# Altium PCB YarnControl_Mainboard_v1.2.PcbDoc
Units mm, origin at the board's own origin, x right, y up, seen from the top; angles counter-clockwise.
Board outline 136.75 x 120 mm, 2 copper layers (Top Layer, Bottom Layer); 124 components, 112 nets, 482 pads, 903 vias.
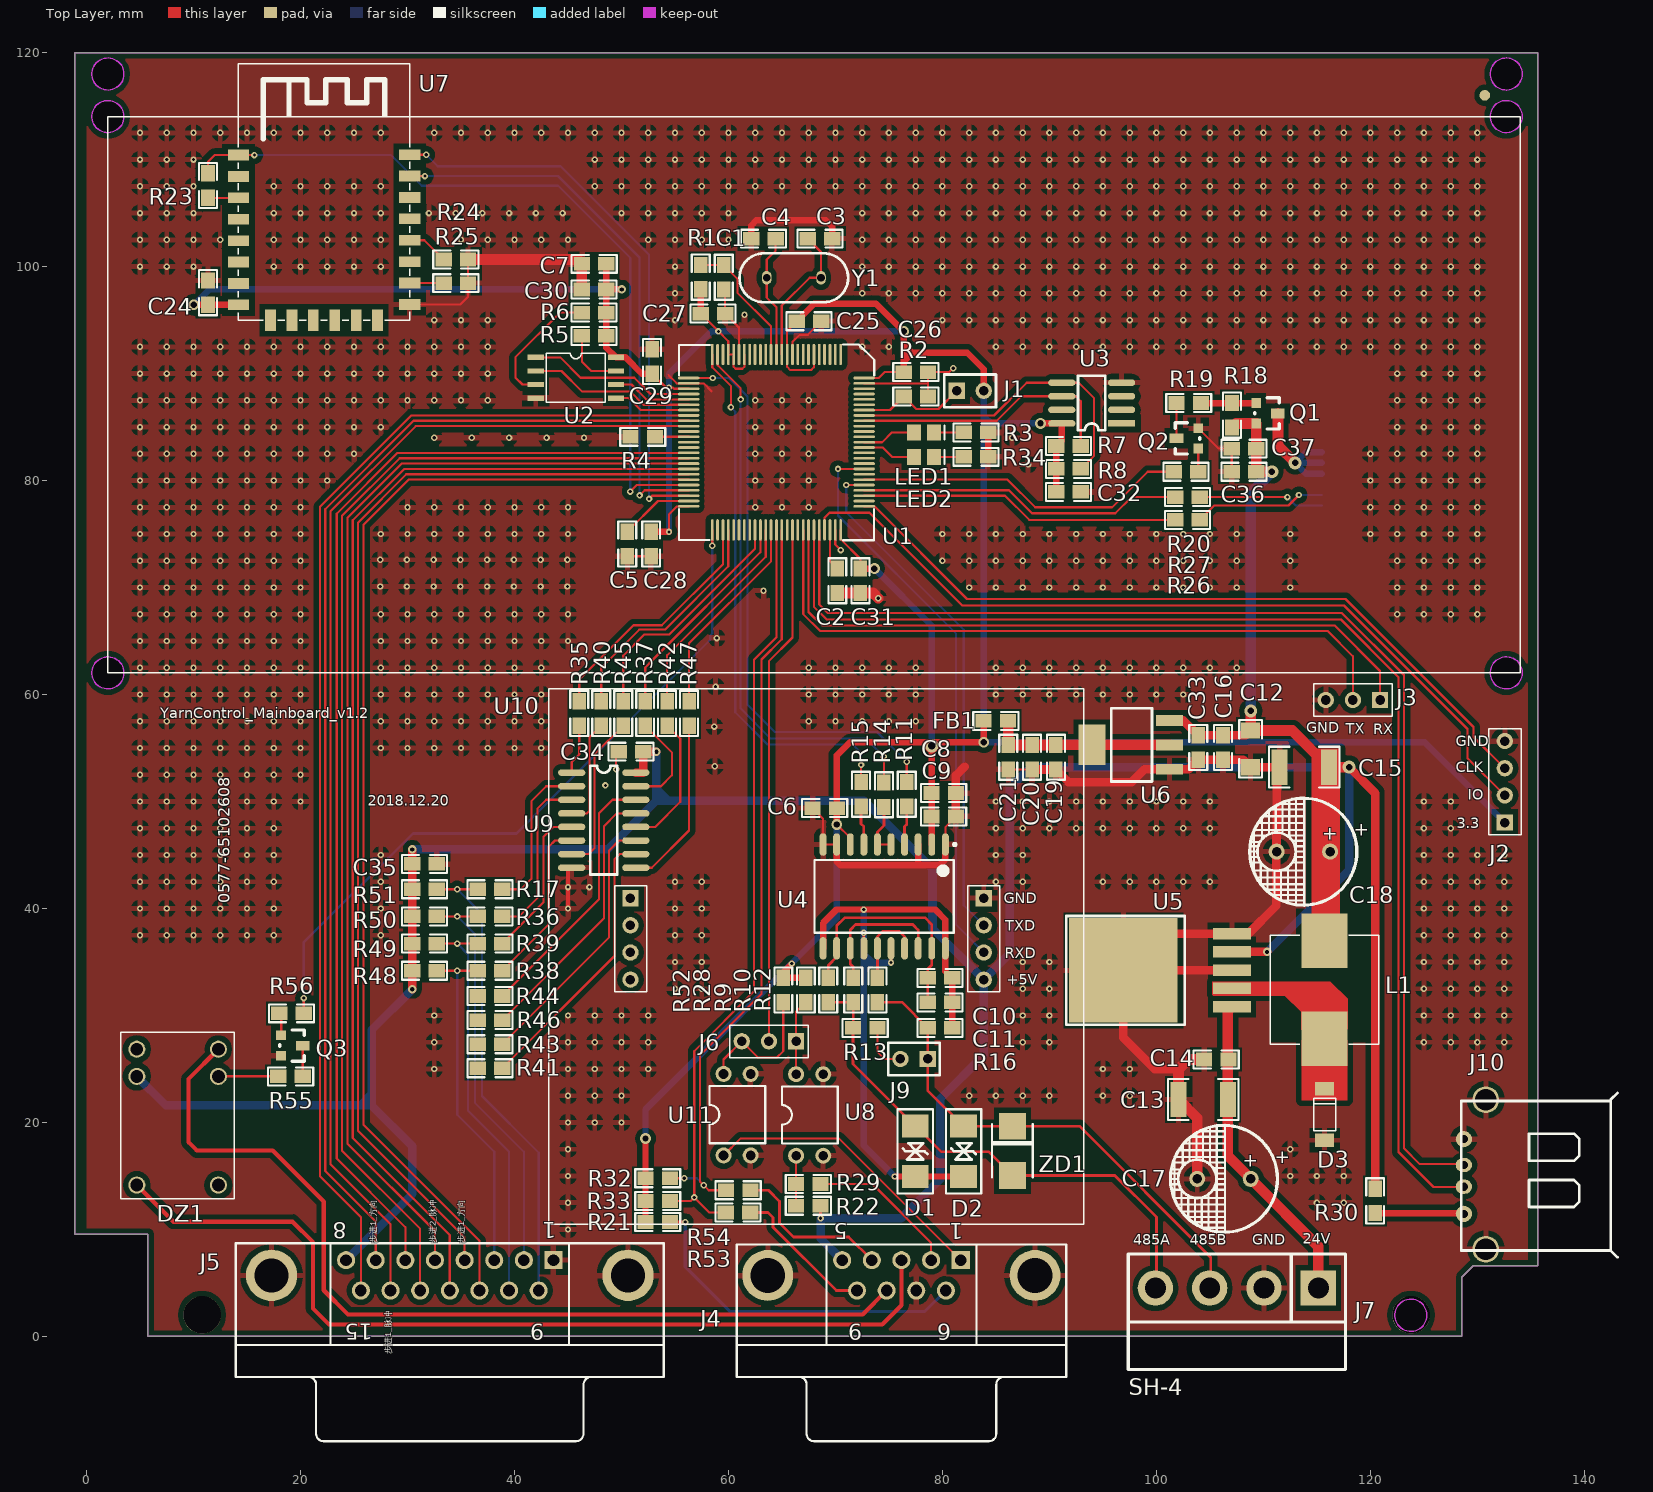
[diagram p0: Top Layer view]
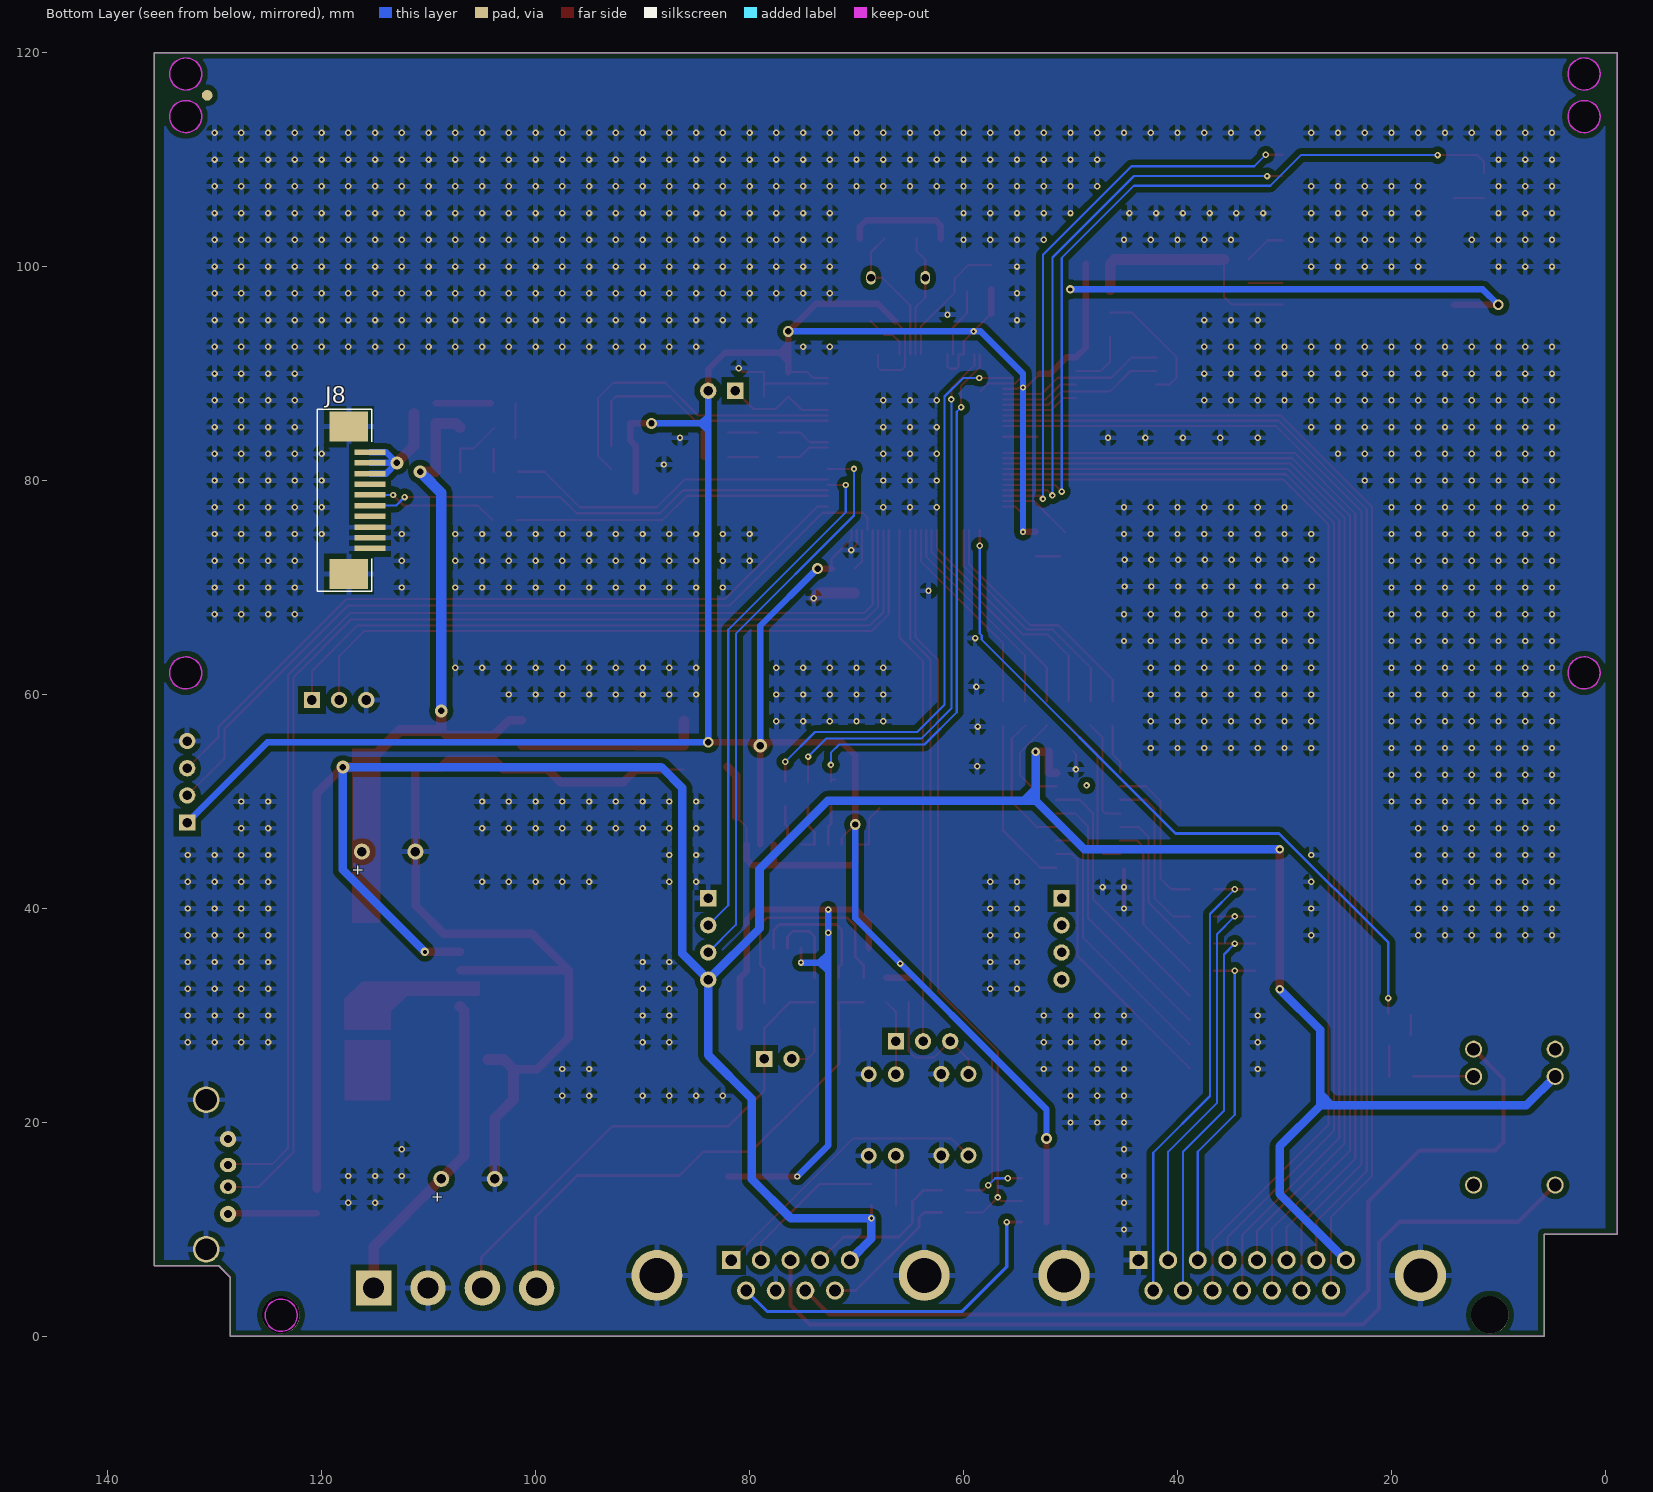
[diagram p1: Bottom Layer view, seen from below]

## Layer stack, top to bottom
Top Layer: signal copper 0.0356
Dielectric: dielectric 0.32, FR-4, Dk 4.8
Bottom Layer: signal copper 0.0356

## Board outline
-1.118,9.55 -1.118,120 135.636,120 135.636,6.604 129.616,6.604 128.549,5.537 128.549,0 5.74,0 5.74,9.55
cut-out: 131.2,118 ccw(c132.7,118) 132.7,116.5 ccw(c132.7,118) 134.2,118 ccw(c132.7,118) 132.7,119.5 ccw(c132.7,118)
cut-out: 131.2,114.019 ccw(c132.7,114.019) 132.7,112.519 ccw(c132.7,114.019) 134.2,114.019 ccw(c132.7,114.019) 132.7,115.519 ccw(c132.7,114.019)
cut-out: 131.2,62.019 ccw(c132.7,62.019) 132.7,60.519 ccw(c132.7,62.019) 134.2,62.019 ccw(c132.7,62.019) 132.7,63.519 ccw(c132.7,62.019)
cut-out: 2,60.519 cw(c2,62.019) 0.5,62.019 cw(c2,62.019) 2,63.519 cw(c2,62.019) 3.5,62.019 cw(c2,62.019)
cut-out: 2,112.519 cw(c2,114.019) 0.5,114.019 cw(c2,114.019) 2,115.519 cw(c2,114.019) 3.5,114.019 cw(c2,114.019)
cut-out: 2,116.5 cw(c2,118) 0.5,118 cw(c2,118) 2,119.5 cw(c2,118) 3.5,118 cw(c2,118)

## Design rules (kind name [scope] priority, off if disabled: settings)
Clearance Clearance_1 [inpoly] p1: gap=0.508
Clearance TQFP100 [(HasFootprint('TQFP100'))] p2: gap=0.178
Clearance [All] p3: gap=0.203
ComponentClearance [All] p1: gap=0 collisioncheckmode=3 verticalgap=0.254 showdistances=FALSE
HoleSize [All] p1: absolutevalues=TRUE maxlimit=4 minlimit=0.025 maxpercent=80.000 minpercent=20.000
MinimumSolderMaskSliver [All] p1: minsoldermaskwidth=0
PolygonConnect [All] p1: connectstyle=Relief reliefconductorwidth=0.508 reliefentries=4 polygonreliefangle="90 Angle"
RoutingVias [All] p1: holewidth=0.711 width=1.27 viastyle="Through Hole" minholewidth=0.3 minwidth=0.6 maxholewidth=0.711 maxwidth=1.27
SilkToSilkClearance [All] p1: silktosilkclearance=0
SilkscreenOverComponentPads [All] p1: minsilkscreentomaskgap=0
SolderMaskExpansion [All] p1: expansion=0.102
Width [All] p1: maxlimit=2 minlimit=0.203 preferedwidth=0.203
23 further rules are at their usual default settings.

## Classes and differential pairs
component class mainboard_interface.v1.2: DZ1 J4 J6 J8 J10 Q1 Q2 Q3 R18 R19 R20 R21 R22 R26 R27 R28 R29 R30 R32 R33 R52 R53 R54 R55 R56 U8 U10 U11
component class mainboard_mcu.v1.2: C1 C2 C3 C4 C5 J1 J2 J3 LED1 LED2 R1 R2 R3 R4 R5 R6 R7 R8 R34 U1 U2 U3 Y1
component class mainboard_rs485.v1.2: C6 C7 C8 C9 C10 C11 C12 C13 C14 C15 C16 C17 C18 C19 C20 C21 C25 C26 C27 C28 C29 C30 C31 C32 C33 C34 C35 C36 C37 D1 D2 D3 FB1 J7 J9 L1 R9 R10 R11 R12 R13 R14 R15 R16 U4 U5 U6 ZD1
component class mainboard_wifi.v1.2: C24 R23 R24 R25 U7
component class mainboard_motor.v1.2: J5 R17 R35 R36 R37 R38 R39 R40 R41 R42 R43 R44 R45 R46 R47 R48 R49 R50 R51 U9

## Components (designator, comment, footprint, x,y, rotation, side; value= is the part's Value field where it differs from the comment)
C1 "0.1uF" 0805#1 59.556,97.86 r90 top
C2 "2.2uF" 0805#1 70.174,69.488 r90 top
C3 "22p" 0805#1 67.405,102.609 r0 top
C4 "22p" 0805#1 64.408,102.609 r180 top
C5 "2.2uF" 0805#1 50.539,75.203 r270 top
C6 "10uF" 0805#1 67.85,49.384 r0 top
C7 "0.1uF" 0805#1 46.304,100.254 r0 top
C8 "0.1uF" 0805#1 81.261,50.798 r180 top
C9 "10nF" 0805#1 81.261,48.597 r180 top
C10 "10uF" 0805#1 80.906,33.509 r180 top
C11 "0.1uF" 0805#1 80.906,31.223 r180 top
C12 "22uF" 1206 108.814,53.213 r90 top
C13 "47uF" 1812 104.369,22.149 r0 top
C14 "0.1uF" 0805#2 105.588,25.883 r0 top
C15 "47uF" 1812 113.817,53.213 r0 top
C16 "0.1uF" 0805#1 106.223,53.899 r90 top
C17 "220uF" CAP-5mm 108.814,14.732 r180 top
C18 "330uF" CAP-5mm 116.23,45.314 r180 top
C19 "10uF" 0805#1 90.602,52.991 r90 top
C20 "0.1uF" 0805#1 88.375,52.991 r90 top
C21 "0.1uF" 0805#1 86.148,52.991 r90 top
C24 "0.1uF" 0805#1 11.354,98.704 r270 top
C25 "0.1uF" 0805#1 68.675,94.888 r180 top
C26 "0.1uF" 0805#1 78.657,90.138 r180 top
C27 "0.1uF" 0805#1 59.69,95.606 r180 top
C28 "0.1uF" 0805#1 52.775,72.917 r90 top
C29 "0.1uF" 0805#1 52.857,92.278 r270 top
C30 "0.1uF" 0805#1 46.298,97.86 r0 top
C31 "0.1uF" 0805#1 72.333,69.488 r90 top
C32 "0.1uF" 0805#1 92.932,78.937 r180 top
C33 "0.1uF" 0805#1 103.911,53.899 r90 top
C34 "0.1uF" 0805#1 49.747,54.661 r0 top
C35 "0.1uF" 0805#1 32.741,44.171 r180 top
C36 "0.1uF" 0805#1 107.036,80.823 r0 top
C37 "0.1uF" 0805#1 107.036,82.982 r0 top
D1 "TVS" SMBJ_DO-214 77.451,17.304 r90 top
D2 "TVS" SMBJ_DO-214 81.972,17.304 r90 top
D3 "1N5819" Diode_TP2 115.722,18.339 r90 top
DZ1 "HRS1H-S-5V" HRS1H-S-DC5 8.509,20.498 r270 top
FB1 "FERRITE" 0805#1 86.131,57.531 r180 top
J1 "Jumper" J254-2 81.324,88.385 r0 top
J2 "SH-4" J254-4 132.563,48.031 r90 top
J3 "SH-3" J2.54-3 118.364,59.487 r180 top
J4 "D Connector 9" DSUB1.385-2H9 76.168,-3.791 r180 top
J5 "D Connector 15" DSUB1.385-2H15 33.953,-3.791 r180 top
J6 "SH-3" J2.54-3 63.779,27.584 r180 top
J7 "SH-4" PWR 115.138,4.521 r0 top
J8 "SDWe050C17" FCC1.0-10 116.459,78.156 r180 bottom
J9 "Jumper" J254-2 78.613,25.933 r180 top
J10 "USB" USB_FEMALE_A 135.992,15.215 r0 top
L1 "Inductor" Inductance 115.697,37.49 r270 top
LED1 "GREEN" LED 78.276,84.499 r0 top
LED2 "GREEN" LED 78.276,82.213 r0 top
Q1 "SI2301" MOS-N_SOT-23 110.338,86.284 r270 top
Q2 "S9014" 901X_SOT-23 101.879,83.947 r90 top
Q3 "S9014" 901X_SOT-23 20.218,27.178 r270 top
R1 "10K" 0805#1 57.404,100.152 r270 top
R2 "10K" 0805#1 76.371,87.852 r0 top
R3 "1K" 0805#1 81.985,84.499 r0 top
R4 "10K" 0805#1 53.13,84.085 r180 top
R5 "10K" 0805#1 48.584,93.516 r180 top
R6 "10K" 0805#1 46.298,95.701 r0 top
R7 "10K" 0805#1 92.932,83.229 r180 top
R8 "10K" 0805#1 92.932,81.083 r180 top
R9 "360R" 0805#1 69.323,31.249 r90 top
R10 "101" 0805#1 71.66,33.535 r270 top
R11 "220" 0805#1 76.664,51.823 r270 top
R12 "101" 0805#1 73.921,33.535 r270 top
R13 "120R" 0805#1 73.921,28.836 r180 top
R14 "1K" 0805#1 74.53,51.772 r270 top
R15 "220" 0805#1 72.397,51.823 r270 top
R16 "360R" 0805#1 80.906,28.836 r180 top
R17 "100R" 0805#2 37.712,41.802 r180 top
R18 "10K" 0805#2 107.061,86.106 r90 top
R19 "10K" 0805#2 103.022,87.249 r0 top
R20 "10K" 0805#2 102.768,80.823 r0 top
R21 "1K" 0805#2 53.391,10.693 r180 top
R22 "1K" 0805#2 67.462,12.217 r180 top
R23 "1K" 0805#1 11.354,108.712 r270 top
R24 "1K/NC" 0805#1 33.376,100.66 r0 top
R25 "1K" 0805#1 33.376,98.45 r0 top
R26 "220" 0805#1 104.045,76.32 r180 top
R27 "220" 0805#1 104.045,78.454 r180 top
R28 "10K" 0805#1 67.234,33.535 r270 top
R29 "1K" 0805#1 66.319,14.249 r0 top
R30 "0R" 0805#2 120.447,12.675 r270 top
R32 "10K" 0805#1 52.248,14.783 r0 top
R33 "10K" 0805#1 52.248,12.662 r0 top
R34 "1K" 0805#1 81.985,82.213 r0 top
R35 "100R" 0805#2 46.057,58.236 r90 top
R36 "100R" 0805#2 37.712,39.262 r180 top
R37 "100R" 0805#2 52.214,58.236 r270 top
R38 "100R" 0805#2 37.712,34.182 r180 top
R39 "100R" 0805#2 37.712,36.722 r180 top
R40 "100R" 0805#2 48.11,58.236 r90 top
R41 "100R" 0805#2 37.712,25.063 r180 top
R42 "100R" 0805#2 54.267,58.236 r270 top
R43 "100R" 0805#2 37.712,27.315 r180 top
R44 "100R" 0805#2 37.712,31.82 r180 top
R45 "100R" 0805#2 50.162,58.236 r90 top
R46 "100R" 0805#2 37.712,29.567 r180 top
R47 "100R" 0805#2 56.319,58.236 r270 top
R48 "10K" 0805#1 30.455,34.182 r0 top
R49 "10K" 0805#1 30.455,36.722 r0 top
R50 "10K" 0805#1 30.455,39.262 r0 top
R51 "10K" 0805#1 30.455,41.802 r0 top
R52 "10K" 0805#2 65.126,32.392 r270 top
R53 "0R" 0805#2 60.884,11.582 r180 top
R54 "0R" 0805#2 60.909,13.665 r180 top
R55 "0R" 0805#2 19.075,24.308 r180 top
R56 "10K" 0805#2 19.152,30.201 r0 top
U1 "STM32F40x" TQFP100 64.484,83.585 r270 top locked
U2 "W25X16" SOP8 45.739,89.605 r0 top
U3 "SMEC98SP" SO-8 93.948,87.242 r180 top
U4 "ADM2587E" SOIC_W_20 75.191,37.827 r270 top
U5 "LM2575-5" TO-263 101.981,34.239 r0 top
U6 "AMS1117" TO-223 97.612,55.296 r90 top
U7 "ESP-12F" ESP-12F 22.2,102.718 r0 top
U8 "TLP521-1" TLP521-1 67.462,19.964 r90 top
U9 "AM26LS31" SO-16 45.346,52.698 r0 top
U10 "MifareRC522" MifareRC522 67.35,37.16 r0 top locked
U11 "TLP521-1" TLP521-1 60.681,19.99 r90 top
Y1 "8M" XTAL 63.57,98.952 r0 top
ZD1 "SMBJ15CA" DO-214AA/SMB 86.538,17.348 r90 top

## Footprints (in the part's own frame and the unit in brackets; to place one, negate y for a bottom-side part, rotate by r counter-clockwise, add the part's x,y. Pads: shape width x height; smd on the part's side, far side on the other; paste and mask are expansions set on the pad)
0805#1 [mil]
  rect 60x50 smd: 1(0,0) 2(90,0)
  silkscreen extent -38,-33 128,33
0805#2 [mil]
  rect 60x50 smd: 1(-45,0) 2(45,0)
  silkscreen extent -83,-33 83,33, body extent -39,-25 39,24, height 18
901X_SOT-23 [mil]
  rect 36x50 smd: 1(0,0)
  rect 36x36 smd: 2(-38,-80) 3(37,-80)
  silkscreen extent -58,-85 57,5
1206 [mil]
  rect 60x70 smd: 1(0,0) 2(135,0)
  silkscreen extent -38,-42 173,42
1812 [mm]
  rect 1.5x3.3 smd: 1(-2.3,0) 2(2.3,0)
  silkscreen extent -3.3,-1.91 3.3,1.91
CAP-5mm [mm]
  round 1.5 hole 0.9: 1(0,0) 2(5,0)
  silkscreen extent -2.5,-5 7.5,5
Diode_TP2 [mil]
  rect 50x70 smd: 1(0,0) 2(190,0)
  silkscreen extent 35,-40 155,40
DO-214AA/SMB [mm]
  rect 2.5x2.5 smd: 1(-2.3,0) 2(2.3,0)
  silkscreen extent -2.5,-1.9 2.5,1.9
DSUB1.385-2H9 [mm] "Connector; D Subminiature; 9 Position; Right Angle; Pitch 1.385 mm"
  rect 1.69x1.69 hole 1.09: 1(-5.54,-10.92)
  round 1.69 hole 1.09: 2(-2.77,-10.92) 3(0,-10.92) 4(2.77,-10.92) 5(5.54,-10.92) 6(-4.155,-8.08) 7(-1.385,-8.08) 8(1.385,-8.08) 9(4.155,-8.08)
  round 4.76 hole 3.26: 10(-12.495,-9.5) 11(12.495,-9.5)
  silkscreen extent -15.4,-12.4 15.4,6
DSUB1.385-2H15 [mm] "Connector; D Subminiature; 15 Position; Right Angle; Pitch 1.385 mm"
  rect 1.69x1.69 hole 1.09: 1(-9.695,-10.92)
  round 1.69 hole 1.09: 2(-6.925,-10.92) 3(-4.155,-10.92) 4(-1.385,-10.92) 5(1.385,-10.92) 6(4.155,-10.92) 7(6.925,-10.92) 8(9.695,-10.92) 9(-8.31,-8.08) 10(-5.54,-8.08) 11(-2.77,-8.08) 12(0,-8.08) 13(2.77,-8.08) 14(5.54,-8.08) 15(8.31,-8.08)
  round 4.8 hole 3.18: 16(-16.66,-9.5) 17(16.66,-9.5)
  silkscreen extent -20,-12.5 20,6
ESP-12F [mm]
  rect 2x1 smd: 1(-8,7.7) 2(-8,5.7) 3(-8,3.7) 4(-8,1.7) 5(-8,-0.3) 6(-8,-2.3) 7(-8,-4.3) 8(-8,-6.3) 15(8,-6.26) 16(8,-4.26) 17(8,-2.26) 18(8,-0.26) 19(8,1.74) 20(8,3.74) 21(8,5.74) 22(8,7.74)
  rect 1x2 smd: 9(-5,-7.74) 10(-3,-7.74) 11(-1,-7.74) 12(1,-7.74) 13(3,-7.74) 14(5,-7.74)
  silkscreen extent -8,-7.74 8,16.26
FCC1.0-10 [mil]
  rect 114x20 smd: 1(39,177) 2(39,137.63) 3(39,98.26) 4(39,58.89) 5(39,19.52) 6(39,-19.85) 7(39,-59.22) 8(39,-98.59) 9(39,-137.96) 10(39,-177.33)
  rect 142x110 smd: 11(-39,271) 12(-39,-271)
  silkscreen extent -155,-335 45,335
HRS1H-S-DC5 [mm]
  round 1.6 hole 1.2: 1(-6.35,-3.81) 2(-3.81,-3.81) 3(6.35,-3.81) 4(6.35,3.81) 5(-3.81,3.81) 6(-6.35,3.81)
  silkscreen extent -7.95,-5.31 7.65,5.31
Inductance [mil]
  rect 200x170 smd: 1(20,0) 2(380,0)
  silkscreen extent 0,-200 400,200
J2.54-3 [mil]
  rect 60x60 hole 35: 1(-100,0)
  round 60 hole 35: 2(0,0) 3(100,0)
  silkscreen extent -145,-60 145,60
J254-2 [mil]
  rect 60x60 hole 35: 1(0,0)
  round 60 hole 35: 2(100,0)
  silkscreen extent -45,-60 145,60
J254-4 [mil]
  rect 60x60 hole 35: 1(0,0)
  round 60 hole 35: 2(100,0) 3(200,0) 4(300,0)
  silkscreen extent -45,-60 345,60
LED [mm]
  rect 1.3x1.5 smd: 1(-0.95,0) 2(0.95,0)
  silkscreen extent 1.9,-0.65 1.9,0.65
MifareRC522 [mil]
  rect 60x60 hole 35: 1(650,150) 8(-650,150)
  round 60 hole 35: 2(650,50) 3(650,-50) 4(650,-150) 5(-650,-150) 6(-650,-50) 7(-650,50)
  silkscreen extent -950,-1050 1019,920
MOS-N_SOT-23 [mil]
  rect 36x50 smd: D(0.5,40)
  rect 36x36 smd: G(-37.5,-40) S(37.5,-40)
  silkscreen extent -58,-45 58,45
PWR [mil]
  rect 130x130 hole 76.77: 1(0,0)
  round 130 hole 76.77: 2(-200,0) 3(-400,0) 4(-600,0)
  silkscreen extent -700,-300 100,125
SMBJ_DO-214 [mm]
  rect 2.16x2.5 smd: 1(-2.35,0) 2(2.35,0)
  silkscreen extent -3.94,-1.65 3.94,1.65, body extent -2.8,-1.95 2.8,1.95, height 2.5
SO-8 [mil]
  rect 100x24 smd: 1(-110,75)
  oval 100x24 smd: 2(-110,25) 3(-110,-25) 4(-110,-75) 5(110,-75) 6(110,-25) 7(110,25) 8(110,75)
  silkscreen extent -50,-100 50,100
SO-16 [mil]
  oval 100x24 smd: 1(0,0) 2(0,-50) 3(0,-100) 4(0,-150) 5(0,-200) 6(0,-250) 7(0,-300) 8(0,-350) 9(236,-350) 10(236,-300) 11(236,-250) 12(236,-200) 13(236,-150) 14(236,-100) 15(236,-50) 16(236,0)
  silkscreen extent 68,-375 168,25
SOIC_W_20 [mm]
  oval 2.1x0.65 smd: 1(-8.152,5.08) 2(-8.152,3.81) 3(-8.152,2.54) 4(-8.152,1.27) 5(-8.152,0) 6(-8.152,-1.27) 7(-8.152,-2.54) 8(-8.152,-3.81) 9(-8.152,-5.08) 10(-8.152,-6.35) 11(1.548,-6.35) 12(1.548,-5.08) 13(1.548,-3.81) 14(1.548,-2.54) 15(1.548,-1.27) 16(1.548,0) 17(1.548,1.27) 18(1.548,2.54) 19(1.548,3.81) 20(1.548,5.08)
  silkscreen extent -8.28,-7.13 0.1,6.08, body extent -8.46,-7.13 1.86,5.86, height 2.5
SOP8 [mm]
  rect 1.5x0.5 smd: 1(-3.75,1.905) 2(-3.75,0.635) 3(-3.75,-0.635) 4(-3.75,-1.905) 5(3.75,-1.905) 6(3.75,-0.635) 7(3.75,0.635) 8(3.75,1.905)
  silkscreen extent -2.75,-2.29 2.75,2.29
TLP521-1 [mm]
  round 1.5 hole 0.9: 1(-3.073,1.143) 2(-3.073,-1.397) 3(4.547,-1.397) 4(4.547,1.143)
  silkscreen extent -1.93,-2.76 3.4,2.44
TO-223 [mil]
  rect 150x100 smd: 0(0,142.5)
  rect 40x100 smd: 1(-90,-142.5) 2(0,-142.5) 3(90,-142.5)
  silkscreen extent -135,-78 135,73
TO-263 [mil]
  rect 400x385 smd: 0(-199.95,-1)
  rect 140x42 smd: 1(199.95,-134) 2(199.95,-67) 3(199.95,0) 4(199.95,67) 5(199.95,134)
  silkscreen extent -410,-201 26,199
TQFP100 [mm]
  round 1 on Top Overlay: 0(-7.62,7.62)
  oval 2x0.254 smd: 1(-8.2,6) 2(-8.2,5.5) 3(-8.2,5) 4(-8.2,4.5) 5(-8.2,4) 6(-8.2,3.5) 7(-8.2,3) 8(-8.2,2.5) 9(-8.2,2) 10(-8.2,1.5) 11(-8.2,1) 12(-8.2,0.5) 13(-8.2,0) 14(-8.2,-0.5) 15(-8.2,-1) 16(-8.2,-1.5) 17(-8.2,-2) 18(-8.2,-2.5) 19(-8.2,-3) 20(-8.2,-3.5) 21(-8.2,-4) 22(-8.2,-4.5) 23(-8.2,-5) 24(-8.2,-5.5) 25(-8.2,-6) 51(8.2,-6) 52(8.2,-5.5) 53(8.2,-5) 54(8.2,-4.5) 55(8.2,-4) 56(8.2,-3.5) 57(8.2,-3) 58(8.2,-2.5) 59(8.2,-2) 60(8.2,-1.5) 61(8.2,-1) 62(8.2,-0.5) 63(8.2,0) 64(8.2,0.5) 65(8.2,1) 66(8.2,1.5) 67(8.2,2) 68(8.2,2.5) 69(8.2,3) 70(8.2,3.5) 71(8.2,4) 72(8.2,4.5) 73(8.2,5) 74(8.2,5.5) 75(8.2,6)
  oval 0.254x2 smd: 26(-6,-8.2) 27(-5.5,-8.2) 28(-5,-8.2) 29(-4.5,-8.2) 30(-4,-8.2) 31(-3.5,-8.2) 32(-3,-8.2) 33(-2.5,-8.2) 34(-2,-8.2) 35(-1.5,-8.2) 36(-1,-8.2) 37(-0.5,-8.2) 38(0,-8.2) 39(0.5,-8.2) 40(1,-8.2) 41(1.5,-8.2) 42(2,-8.2) 43(2.5,-8.2) 44(3,-8.2) 45(3.5,-8.2) 46(4,-8.2) 47(4.5,-8.2) 48(5,-8.2) 49(5.5,-8.2) 50(6,-8.2) 76(6,8.2) 77(5.5,8.2) 78(5,8.2) 79(4.5,8.2) 80(4,8.2) 81(3.5,8.2) 82(3,8.2) 83(2.5,8.2) 84(2,8.2) 85(1.5,8.2) 86(1,8.2) 87(0.5,8.2) 88(0,8.2) 89(-0.5,8.2) 90(-1,8.2) 91(-1.5,8.2) 92(-2,8.2) 93(-2.5,8.2) 94(-3,8.2) 95(-3.5,8.2) 96(-4,8.2) 97(-4.5,8.2) 98(-5,8.2) 99(-5.5,8.2) 100(-6,8.2)
  silkscreen extent -9.12,-9.1 9.17,9.14
USB_FEMALE_A [mil]
  round 60 hole 30: 1(-285.63,-147.91) 4(-285.63,127.09)
  oval 60x52.13 hole 30: 2(-285.63,-47.91) 3(-285.63,32.09)
  round 98.43 hole 78.74: 5(-205,272.09) 6(-205,-277.91)
  silkscreen extent -296,-308 279,297
XTAL [mil]
  oval 35x50 hole 28: 1(0,0) 2(200,0)
  silkscreen extent -100,-90 300,90

## Part data
C1 C2 C3 C4 C5 C6 C7 C8 C9 C10 C11 C13 C14 C24: library part Cap, "Capacitor"
C12 C15 C16 C19 C20 C21 C25 C26 C27 C28 C29 C30 C31 C32 C33 C34 C35 C36 C37: library part Cap0805
C17 C18: library part "Cap Pol1", "Polarized Capacitor (Radial)"
D3: library part "Diode 1N4148", "High Conductance Fast Diode"
J4: "Receptacle Assembly, 9 Position, Right Angle"
J5: "Receptacle Assembly, 15 Position, Right Angle"
J8: library part SH-12
LED1 LED2: library part LED2, "Typical RED, GREEN, YELLOW, AMBER GaAs LED"
Q1: library part MOS-P_SOT-23
Q2 Q3: library part NPN
R1 R4 R5 R6 R7 R8 R9 R10 R11 R12 R13 R14 R15 R16 R17 R18 R19 R20 R21 R22 R23 R24 R25 R26 R27 R28 R29 R30 R32 R33 R35 R36 R37 R38 R39 R40 R41 R42 R43 R44 R45 R46 R47 R48 R49 R50 R51 R52 R53 R54: library part Res2, "Resistor"
R2 R3 R34 R55 R56: library part RES, "电阻"
U4: "isolated DC-DC RS485"
U5: library part LM25XX
Y1: library part X-32.768, "Crystal Oscillator"
ZD1: library part TVS, "瞬态抑制二极管"

## Free pads (board coordinates)
  round 1 smd: 0(130.7,116)
  round 1 smd far side: 0(130.7,116)
  round 3.5 hole 3.5: 1(10.8,2.019) 1(123.8,2.019)

## Via types
v1: diameter 0.6, hole 0.3, Top Layer to Bottom Layer, 886 vias
v2: diameter 1, hole 0.6, Top Layer to Bottom Layer, 7 vias
v3: diameter 0.8, hole 0.4, Top Layer to Bottom Layer, 5 vias
v4: diameter 1.2, hole 0.6, Top Layer to Bottom Layer, 4 vias
v5: diameter 1.27, hole 0.711, Top Layer to Bottom Layer, 1 vias

## Nets (pads, with @x,y where several pads share a name; then routed paths per layer and width w, separated by ;. In a path a pad name is that pad's centre, name@x,y a point inside that pad or via, vN(x,y) a via of type N, cw(c..) or ccw(c..) an arc to the next point about the centre after c; other vN are vias at no path point)
485_DE: R14.1 U1.24 | length 51.7
  Top Layer w0.203: U1.24 58.984,90.774 61.138,88.621 v1(61.138,87.579) ; R14.1 v1(74.53,54.197)
  Bottom Layer w0.203: v1(61.138,87.579) 61.138,58.699 63.957,55.88 72.847,55.88 v1(74.53,54.197)
485_RX: R11.1 U1.26 | length 55
  Top Layer w0.203: U1.26@55.461,89.585 U1.26 v1(58.522,89.585) ; R11.1@76.664,52.026 R11.1 v1(76.664,53.714)
  Bottom Layer w0.203: v1(58.522,89.585) 60.037,89.585 61.773,87.849 61.773,59.055 64.338,56.49 73.889,56.49 v1(76.664,53.714)
485_TX: R15.1 U1.25 | length 51.6
  Top Layer w0.203: U1.25@58.484,90.945 U1.25 58.484,90.589 60.223,88.849 v1(60.223,86.843) ; R15.1@71.984,52.07 R15.1@72.397,52.07 ; R15.1 R15.1@72.397,52.07 ; v1(72.397,53.416) R15.1@72.397,52.07
  Bottom Layer w0.203: v1(60.223,86.843) 60.63,86.436 60.63,58.344 63.652,55.321 71.628,55.321 72.397,54.553 v1(72.397,53.416)
+3.3V: C6.2 C7.2 C8.2 C9.2 C24.2 C25.2 C26.2 C27.2 C28.2 C29.2 C30.2 C31.2 C32.2 FB1.2 J1.2 J2.1 R1.2 R5.1 R6.2 R7.2 R8.2 R21.2 R28.1 R32.1 R33.1 R52.1 U1.6 U1.11 U1.19 U1.21 U1.22 U1.28 U1.50 U1.75 U1.100 U2.8 U3.8 U4.2 U4.8 U7.8 | length 370.5
  Top Layer w0.203: C29.2 54.153,88.697 v1(54.439,88.697) 54.794,88.697 54.906,88.585 U1.28 ; v1(54.439,75.203) 54.439,76.842 55.182,77.585 U1.50 ; C27.2 59.064,93.945 59.984,93.026 U1.22 U1.21 60.484,90.621 60.655,90.449 61.29,90.449 61.484,90.643 U1.19 ; C25.2 65.484,93.983 U1.11 65.484,90.624 65.786,90.322 67.716,90.322 67.984,90.59 U1.6 ; v2(70.129,47.854) 71.381,46.602 U4.8 ; 70.129,51.841 70.136,51.835 C6.2 ; U1.75 70.484,74.516 72.333,72.667 C31.2 ; U1.100 74.04,89.585 74.593,90.138 C26.2
  Top Layer w0.6: v2(10.033,96.418) C24.2 ; C24.2@11.355,96.418 U7.8 ; C30.2@48.59,97.866 C7.2 ; v3(50.013,97.86) C30.2 R6.2 R5.1 48.584,92.415 U2.8 50.375,91.51 51.892,89.992 C29.2 ; R21.2 R32.1 52.248,16.904 v2(52.248,18.504) ; C28.2@53.232,75.203 v1(54.439,75.203) ; C27.2 R1.2 ; v1(65.92,34.849) 65.126,34.055 R52.1 R28.1 ; C25.2 68.021,96.52 73.787,96.52 v2(76.371,93.936) 76.371,92.767 ; v2(70.129,47.854) 70.129,49.384 C6.2@70.129,49.391 ; C6.2 C6.2@70.129,49.391 ; C31.2 v2(73.641,71.774) ; C26.2 76.371,91.129 ; v5@78.994,55.538 v5@79.001,55.531 ; U4.2 79.001,48.597 79.001,50.798 v5@79.001,54.686 ; FB1.2 83.845,55.556 v2(83.871,55.531) 79.756,55.531 ; J1.2 83.864,90.405 82.321,91.948 77.191,91.948 ; v2(89.161,85.337) U3.8 91.154,83.737 R7.2 R8.2 C32.2 ; C6.2@70.129,49.391 70.129,51.841 70.129,54.305 71.355,55.531 78.156,55.531 ; 76.371,91.129 76.371,91.948 ; 76.371,91.129 77.191,91.948 ; 76.371,91.948 76.371,92.767 ; 76.371,91.948 77.191,91.948 ; 76.371,92.767 77.191,91.948 ; 78.156,55.531 78.743,54.943 v5@79.001,54.686 ; 78.156,55.531 v5@79.001,55.531 ; v5@79.001,54.686 v5(79.001,55.201) v5@79.001,55.531 ; v5@79.001,54.686 79.258,54.943 79.756,55.442 79.756,55.531 ; v5@79.001,55.531 79.756,55.531
  Bottom Layer w0.6: v2(10.033,96.418) 11.474,97.86 v3(50.013,97.86) ; v2(52.248,18.504) 52.248,21.209 70.129,39.091 v2(70.129,47.854) ; v1(54.439,75.203) v1(54.439,88.697) 54.439,89.992 58.382,93.936 v1(59.055,93.936) v2(76.371,93.936) ; v2(73.641,71.774) 79.001,66.414 v5@79.001,55.531 ; v2@83.864,55.531 83.864,84.67 ; J1.2 83.864,86.004 ; v2(83.871,55.531) 125.063,55.531 J2.1 ; 83.947,85.337 84.531,85.337 ; v2(89.161,85.337) 84.531,85.337 ; 83.864,84.67 83.864,86.004 ; 83.864,84.67 84.531,85.337 ; 83.864,86.004 84.531,85.337
+5V: C12.2 C15.2 C16.2 C18.1 C33.2 C34.2 C35.2 C36.2 C37.2 DZ1.2 J4.5 J5.8 L1.1 Q1.S R18.1 R22.1 R30.1 R48.1 R49.1 R50.1 R51.1 U5.4 U6.3 U9.16 U10.4 | length 365.3
  Top Layer w0.3: v1(68.605,11.049) R22.1
  Top Layer w0.8: v3(30.455,32.461) R48.1 R49.1 R50.1 R51.1 C35.2 v3(30.455,45.517) ; U9.16 52.033,52.698 C34.2 v3(53.264,54.661) ; U6.3 102.514,57.582 C33.2 C16.2 108.356,56.185 C12.2 ; U5.4 v3(110.338,35.941) ; v4(118.008,53.213) 120.447,50.775 R30.1
  Top Layer w1: R18.1 107.429,85.331 Q1.S C37.2 C36.2 v4(110.795,80.823) ; v4(108.814,58.471) C12.2 112.688,56.642 C15.2 ; C18.1 116.23,53.1 C15.2 ; v4(118.008,53.213) C15.2
  Bottom Layer w0.3: v1(68.605,11.049) 68.605,9.151 J4.5
  Bottom Layer w0.8: DZ1.2 7.417,21.59 26.645,21.59 ; J5.8 30.455,13.325 30.455,17.78 26.645,21.59 ; 25.603,21.59 26.645,22.631 ; v3(30.455,32.461) 26.645,28.651 26.645,22.631 ; v3(30.455,45.517) 48.692,45.517 53.264,50.089 ; v3(53.264,54.661) 53.264,51.181 ; J4.5 68.605,9.151 v1(68.605,11.049) 76.149,11.049 79.781,14.681 79.781,22.2 83.86,26.278 U10.4 ; v3(110.338,35.941) 118.008,43.612 v4(118.008,53.213) 88.24,53.213 86.294,51.267 86.294,35.784 U10.4 ; 26.645,21.59 26.645,22.631 ; 53.264,50.089 53.264,51.181 ; 53.264,50.089 54.356,50.089 ; 53.264,51.181 54.356,50.089 ; 54.356,50.089 72.669,50.089 79.07,43.688 79.07,38.14 U10.4
  Bottom Layer w1: v4(108.814,58.471) 108.814,78.842 v4(110.795,80.823) 109.69,79.718
+24V: C13.2 C14.2 C17.1 J7.1 U5.1 | length 30
  Top Layer w1: U5.1 106.669,30.445 C13.2 106.669,16.877 C17.1 115.138,8.407 J7.1
BOOT0: J1.1 R2.1 U1.94 | length 10.4
  Top Layer w0.203: U1.94 75.104,86.585 R2.1 77.54,86.684 79.622,86.684 J1.1
BOOT1: R4.1 U1.37 | length 3.2
  Top Layer w0.254: R4.1 U1.37
CLOSE_SW: J6.2 U1.66 | length 48.7
  Top Layer w0.203: J6.2 63.779,63.119 65.984,65.324 U1.66
CLOSE_SW_IN: J4.2 R29.2 | length 14.2
  Top Layer w0.203: R29.2 73.457,14.249 78.938,8.768 J4.2
DIFF_G: R40.2 U1.54 | length 22.3
  Top Layer w0.203: R40.2 48.11,62.511 51.664,66.065 54.073,66.065 59.984,71.977 U1.54
DIFF_G\: R42.1 U1.61 | length 19.8
  Top Layer w0.203: R42.1 54.267,63.665 63.484,72.882 U1.61
DIFF_IN1: R35.2 U1.53 | length 23.1
  Top Layer w0.203: R35.2 46.057,61.399 51.13,66.472 53.772,66.472 59.484,72.184 U1.53
DIFF_IN2: R45.2 U1.59 | length 22.5
  Top Layer w0.203: R45.2 50.162,63.624 52.139,65.601 54.451,65.601 62.484,73.635 U1.59
DIFF_IN3: R47.1 U1.62 | length 19.2
  Top Layer w0.203: R47.1 56.319,64.803 63.984,72.468 U1.62
DIFF_IN4: R37.1 U1.60 | length 21.3
  Top Layer w0.203: R37.1 52.214,62.527 52.954,63.266 ; 52.337,62.649 52.954,63.266 ; U1.60 62.984,73.296 52.954,63.266
DIFF_OUTPUT1+: R17.1 U9.2 | length 14.7
  Top Layer w0.203: R17.1 40.608,41.802 41.58,42.774 41.58,50.038 42.97,51.428 U9.2
DIFF_OUTPUT1-: R36.1 U9.3 | length 15.9
  Top Layer w0.203: R36.1 40.43,39.262 42.139,40.97 42.139,49.327 42.97,50.158 U9.3
DIFF_OUTPUT2+: R38.1 U9.6 | length 15.8
  Top Layer w0.203: R38.1 43.205,38.532 43.205,45.771 43.783,46.348 U9.6
DIFF_OUTPUT2-: R39.1 U9.5 | length 14.6
  Top Layer w0.203: R39.1 42.697,40.564 42.697,46.685 43.631,47.618 U9.5
DIFF_OUTPUT3+: R41.1 U9.10 | length 26.1
  Top Layer w0.203: R41.1 49.352,35.56 49.352,44.602 49.828,45.078 U9.10
DIFF_OUTPUT3-: R43.1 U9.11 | length 25.1
  Top Layer w0.203: R43.1 48.844,37.304 48.844,45.427 49.766,46.348 U9.11
DIFF_OUTPUT4+: R44.1 U9.14 | length 24.8
  Top Layer w0.203: R44.1 47.904,40.869 47.904,48.907 49.156,50.158 U9.14
DIFF_OUTPUT4-: R46.1 U9.13 | length 25.5
  Top Layer w0.203: R46.1 48.362,39.074 48.362,47.687 49.563,48.888 U9.13
ENCODER_B: R32.2 R54.2 U1.64 | length 70.3
  Top Layer w0.203: R32.2 v1(55.867,14.783) ; R54.2 58.153,13.665 v1(57.68,14.138) 57.328,14.491 57.328,26.264 63.094,32.029 63.094,63.267 64.984,65.158 U1.64
  Bottom Layer w0.203: v1(55.867,14.783) 57.036,14.783 v1(57.68,14.138)
ENCODER_C: R33.2 R53.2 U1.63 | length 71.5
  Top Layer w0.203: R33.2 56.464,12.662 v1(56.794,12.992) ; R53.2 58.204,11.582 v1(56.794,12.992) ; U1.63 64.484,65.365 62.382,63.263 62.382,32.258 56.794,26.67 v1(56.794,12.992)
FLASH_SPI_MISO: U1.31 U2.2 | length 15.6
  Top Layer w0.203: U2.2 44.393,90.24 46.298,88.335 50.807,88.335 52.056,87.085 U1.31
FLASH_SPI_MOSI: U1.32 U2.5 | length 7.3
  Top Layer w0.203: U2.5 50.68,87.7 51.794,86.585 U1.32
FLASH_SPI_NSS: U1.29 U2.1 | length 15.7
  Top Layer w0.203: U2.1 44.266,91.51 46.171,89.605 51.188,89.605 52.707,88.085 U1.29
FLASH_SPI_SCK: U1.30 U2.6 | length 7.4
  Top Layer w0.203: U2.6 50.934,88.97 52.318,87.585 U1.30
GND: C1.1 C2.1 C3.2 C4.2 C5.2 C6.1 C7.1 C8.1 C9.1 C12.1 C13.1 C14.1 C15.1 C16.1 C17.2 C18.2 C19.1 C20.1 C21.1 C24.1 C25.1 C26.1 C27.1 C28.1 C29.1 C30.1 C31.1 C32.1 C33.1 C34.1 C35.1 C36.1 C37.1 D3.1 J2.4 J3.3 J4.7 J4.10 J4.11 J5.1 J5.16 J5.17 J7.2 J8.8 J8.9 J8.10 J8.11 J8.12 J10.4 J10.5 J10.6 Q2.3 Q3.3 R2.2 R3.2 R4.2 R24.2 R25.2 R34.2 U1.10 U1.20 U1.27 U1.74 U1.99 U2.4 U3.4 U4.1 U4.3 U4.9 U4.10 U5.0 U5.3 U5.5 U6.1 U7.15 U8.2 U8.3 U9.8 U10.1 U11.2 U11.3 | length 206.2
  Top Layer w0.203: U7.15 34.939,96.458 35.662,97.18 R25.2 R24.2 ; v1(49.5,53) 49.5,54.414 C34.1 ; C5.2@50.997,72.917 C28.1 C28.1@53.232,72.917 ; 54.381,89.865 55.162,89.085 U1.27 57.676,89.085 58.42,88.341 ; C1.1@59.69,97.726 C27.1 60.984,94.312 U1.20 U1.20@60.984,92.749 ; U1.10 65.984,92.959 66.65,93.624 67.412,93.624 C25.1 ; C6.1 68.841,48.394 U4.10 U4.9 ; U1.74 69.984,74.016 v1(70.5,73.5) ; U1.99 78.657,89.085 ; R2.2 C26.1 80.638,90.138 v1(81,90.5) ; U4.1 80.271,47.606 C9.1 ; C21.1 C20.1 ; Q2.3 105.816,82.982 C37.1 C36.1
  Top Layer w0.4: v1(45,40) U9.8@45,43.649
  Top Layer w0.6: C4.2 62.122,103.829 62.611,104.318 69.088,104.318 69.691,103.715 C3.2 ; U4.9 70.111,44.393 70.46,44.044 79.731,44.044 80.271,44.584 U4.1 ; 77.731,44.062 U4.3 ; R34.2 R3.2
  Top Layer w0.8: C9.1 C8.1 81.261,52.432 82.074,53.245 ; C20.1 C19.1 91.777,51.816 97.688,51.816 98.882,53.01 U6.1 103.022,53.01 C33.1 C16.1 108.128,53.899 C12.1 C15.1 111.23,52.926 C18.2 ; U5.0 96.902,27.939 99.861,24.98 102.069,24.98 ; U5.3 96.928,34.239 100.331,37.643 U5.5 108.585,37.643 111.187,40.245 111.187,45.314 111.187,47.193
  Top Layer w1: R24.2 45.885,100.66 46.298,100.247 C30.1 ; C2.1 C31.1 73.512,69.488 v1(74,69) ; C17.2 103.814,20.404 C13.1 102.069,24.98 102.972,25.883 C14.1
  other v1: 45,10 45,12.5 115,12.5 117.5,12.5 45,15 112.5,15 115,15 117.5,15 45,17.5 112.5,17.5 45,20 47.5,20 50,20 45,22.5 47.5,22.5 50,22.5 82.5,22.5 85,22.5 87.5,22.5 90,22.5 95,22.5 97.5,22.5 32.5,25 45,25 47.5,25 50,25 52.5,25 95,25 97.5,25 32.5,27.5 45,27.5 47.5,27.5 50,27.5 52.5,27.5 87.5,27.5 90,27.5 125,27.5 127.5,27.5 130,27.5 132.5,27.5 32.5,30 45,30 47.5,30 50,30 52.5,30 87.5,30 90,30 125,30 127.5,30 130,30 132.5,30 55,32.5 57.5,32.5 87.5,32.5 90,32.5 125,32.5 127.5,32.5 130,32.5 132.5,32.5 55,35 57.5,35 87.5,35 90,35 125,35 127.5,35 130,35 132.5,35 5,37.5 7.5,37.5 10,37.5 12.5,37.5 15,37.5 17.5,37.5 27.5,37.5 55,37.5 57.5,37.5 125,37.5 127.5,37.5 130,37.5 132.5,37.5 5,40 7.5,40 10,40 12.5,40 15,40 17.5,40 27.5,40 55,40 57.5,40 125,40 127.5,40 130,40 132.5,40 45,42 47,42 5,42.5 7.5,42.5 10,42.5 12.5,42.5 15,42.5 17.5,42.5 27.5,42.5 55,42.5 57.5,42.5 85,42.5 87.5,42.5 95,42.5 97.5,42.5 100,42.5 102.5,42.5 105,42.5 125,42.5 127.5,42.5 130,42.5 132.5,42.5 5,45 7.5,45 10,45 12.5,45 15,45 17.5,45 27.5,45 85,45 87.5,45 125,45 127.5,45 130,45 132.5,45 5,47.5 7.5,47.5 10,47.5 12.5,47.5 15,47.5 17.5,47.5 85,47.5 87.5,47.5 90,47.5 92.5,47.5 95,47.5 97.5,47.5 100,47.5 102.5,47.5 105,47.5 125,47.5 127.5,47.5 5,50 7.5,50 10,50 12.5,50 15,50 17.5,50 20,50 85,50 87.5,50 90,50 92.5,50 95,50 97.5,50 100,50 102.5,50 105,50 125,50 127.5,50 5,52.5 7.5,52.5 10,52.5 12.5,52.5 15,52.5 17.5,52.5 20,52.5 58.725,53.289 5,55 7.5,55 10,55 12.5,55 15,55 17.5,55 20,55 27.5,55 30,55 32.5,55 35,55 37.5,55 40,55 42.5,55 58.674,56.998 5,57.5 7.5,57.5 10,57.5 12.5,57.5 15,57.5 17.5,57.5 20,57.5 27.5,57.5 30,57.5 32.5,57.5 35,57.5 37.5,57.5 40,57.5 42.5,57.5 67.5,57.5 70,57.5 72.5,57.5 75,57.5 77.5,57.5 5,60 7.5,60 10,60 12.5,60 15,60 17.5,60 20,60 27.5,60 30,60 32.5,60 35,60 37.5,60 40,60 42.5,60 67.5,60 70,60 72.5,60 75,60 77.5,60 85,60 87.5,60 90,60 92.5,60 95,60 97.5,60 100,60 102.5,60 58.801,60.731 5,62.5 7.5,62.5 10,62.5 12.5,62.5 15,62.5 17.5,62.5 20,62.5 27.5,62.5 30,62.5 32.5,62.5 35,62.5 37.5,62.5 40,62.5 42.5,62.5 67.5,62.5 70,62.5 72.5,62.5 75,62.5 77.5,62.5 85,62.5 87.5,62.5 90,62.5 92.5,62.5 95,62.5 97.5,62.5 100,62.5 102.5,62.5 105,62.5 107.5,62.5 5,65 7.5,65 10,65 12.5,65 15,65 17.5,65 20,65 27.5,65 30,65 32.5,65 35,65 37.5,65 40,65 42.5,65 45,65 58.903,65.278 5,67.5 7.5,67.5 10,67.5 12.5,67.5 15,67.5 17.5,67.5 20,67.5 27.5,67.5 30,67.5 32.5,67.5 35,67.5 37.5,67.5 40,67.5 42.5,67.5 45,67.5 122.5,67.5 125,67.5 127.5,67.5 130,67.5 63.271,69.698 5,70 7.5,70 10,70 12.5,70 15,70 17.5,70 20,70 82.5,70 85,70 87.5,70 90,70 92.5,70 95,70 97.5,70 100,70 102.5,70 105,70 107.5,70 112.5,70 122.5,70 125,70 127.5,70 130,70 27.443,70.094 29.943,70.094 32.443,70.094 34.943,70.094 37.443,70.094 39.943,70.094 42.443,70.094 44.943,70.094 5,72.5 7.5,72.5 10,72.5 12.5,72.5 15,72.5 17.5,72.5 20,72.5 80,72.5 82.5,72.5 85,72.5 87.5,72.5 90,72.5 92.5,72.5 95,72.5 97.5,72.5 100,72.5 102.5,72.5 105,72.5 107.5,72.5 112.5,72.5 122.5,72.5 125,72.5 127.5,72.5 130,72.5 27.443,72.594 29.943,72.594 32.443,72.594 34.943,72.594 37.443,72.594 39.943,72.594 42.443,72.594 44.943,72.594 5,75 7.5,75 10,75 12.5,75 15,75 17.5,75 20,75 27.5,75 30,75 32.5,75 35,75 37.5,75 40,75 42.5,75 45,75 80,75 82.5,75 85,75 87.5,75 90,75 92.5,75 95,75 97.5,75 100,75 102.5,75 105,75 107.5,75 112.5,75 120,75 122.5,75 125,75 127.5,75 130,75 5,77.5 7.5,77.5 10,77.5 12.5,77.5 15,77.5 17.5,77.5 20,77.5 30,77.5 32.5,77.5 35,77.5 37.5,77.5 40,77.5 42.5,77.5 45,77.5 62.5,77.5 65,77.5 67.5,77.5 120,77.5 122.5,77.5 125,77.5 127.5,77.5 130,77.5 5,80 7.5,80 10,80 12.5,80 15,80 17.5,80 20,80 22.5,80 62.5,80 65,80 67.5,80 120,80 122.5,80 125,80 127.5,80 130,80 88,81.5 5,82.5 7.5,82.5 10,82.5 12.5,82.5 15,82.5 17.5,82.5 20,82.5 22.5,82.5 25,82.5 62.5,82.5 65,82.5 67.5,82.5 120,82.5 122.5,82.5 125,82.5 127.5,82.5 130,82.5 32.5,84 36,84 39.5,84 43,84 46.5,84 86.5,84 5,85 7.5,85 10,85 12.5,85 15,85 17.5,85 20,85 22.5,85 25,85 27.5,85 62.5,85 65,85 67.5,85 122.5,85 125,85 127.5,85 130,85 5,87.5 7.5,87.5 10,87.5 12.5,87.5 15,87.5 17.5,87.5 20,87.5 22.5,87.5 25,87.5 27.5,87.5 30,87.5 32.5,87.5 35,87.5 37.5,87.5 62.5,87.5 65,87.5 67.5,87.5 122.5,87.5 125,87.5 127.5,87.5 130,87.5 5,90 7.5,90 10,90 12.5,90 15,90 17.5,90 20,90 22.5,90 25,90 27.5,90 30,90 32.5,90 35,90 37.5,90 122.5,90 125,90 127.5,90 130,90 5,92.5 7.5,92.5 10,92.5 12.5,92.5 15,92.5 17.5,92.5 20,92.5 22.5,92.5 25,92.5 27.5,92.5 30,92.5 32.5,92.5 35,92.5 37.5,92.5 72.5,92.5 75,92.5 85,92.5 87.5,92.5 90,92.5 92.5,92.5 95,92.5 97.5,92.5 100,92.5 102.5,92.5 105,92.5 107.5,92.5 110,92.5 112.5,92.5 115,92.5 117.5,92.5 120,92.5 122.5,92.5 125,92.5 127.5,92.5 130,92.5 32.5,95 35,95 37.5,95 55,95 80,95 82.5,95 85,95 87.5,95 90,95 92.5,95 95,95 97.5,95 100,95 102.5,95 105,95 107.5,95 110,95 112.5,95 115,95 117.5,95 120,95 122.5,95 125,95 127.5,95 130,95 61.5,95.5 55,97.5 72.5,97.5 75,97.5 77.5,97.5 80,97.5 82.5,97.5 85,97.5 87.5,97.5 90,97.5 92.5,97.5 95,97.5 97.5,97.5 100,97.5 102.5,97.5 105,97.5 107.5,97.5 110,97.5 112.5,97.5 115,97.5 117.5,97.5 120,97.5 122.5,97.5 125,97.5 127.5,97.5 130,97.5 5,100 7.5,100 10,100 17.5,100 20,100 22.5,100 25,100 27.5,100 55,100 72.5,100 75,100 77.5,100 80,100 82.5,100 85,100 87.5,100 90,100 92.5,100 95,100 97.5,100 100,100 102.5,100 105,100 107.5,100 110,100 112.5,100 115,100 117.5,100 120,100 122.5,100 125,100 127.5,100 130,100 5,102.5 7.5,102.5 10,102.5 12.5,102.5 17.5,102.5 20,102.5 22.5,102.5 25,102.5 27.5,102.5 35,102.5 37.5,102.5 40,102.5 42.5,102.5 45,102.5 52.5,102.5 55,102.5 57.5,102.5 60,102.5 72.5,102.5 75,102.5 77.5,102.5 80,102.5 82.5,102.5 85,102.5 87.5,102.5 90,102.5 92.5,102.5 95,102.5 97.5,102.5 100,102.5 102.5,102.5 105,102.5 107.5,102.5 110,102.5 112.5,102.5 115,102.5 117.5,102.5 120,102.5 122.5,102.5 125,102.5 127.5,102.5 130,102.5 5,105 7.5,105 10,105 17.5,105 20,105 22.5,105 25,105 27.5,105 32,105 34.5,105 37,105 39.5,105 42,105 44.5,105 50,105 52.5,105 55,105 57.5,105 60,105 72.5,105 75,105 77.5,105 80,105 82.5,105 85,105 87.5,105 90,105 92.5,105 95,105 97.5,105 100,105 102.5,105 105,105 107.5,105 110,105 112.5,105 115,105 117.5,105 120,105 122.5,105 125,105 127.5,105 130,105 5,107.5 7.5,107.5 10,107.5 17.5,107.5 20,107.5 22.5,107.5 25,107.5 27.5,107.5 47.5,107.5 50,107.5 52.5,107.5 55,107.5 57.5,107.5 60,107.5 62.5,107.5 65,107.5 67.5,107.5 70,107.5 72.5,107.5 75,107.5 77.5,107.5 80,107.5 82.5,107.5 85,107.5 87.5,107.5 90,107.5 92.5,107.5 95,107.5 97.5,107.5 100,107.5 102.5,107.5 105,107.5 107.5,107.5 110,107.5 112.5,107.5 115,107.5 117.5,107.5 120,107.5 122.5,107.5 125,107.5 127.5,107.5 130,107.5 5,110 7.5,110 10,110 47.5,110 50,110 52.5,110 55,110 57.5,110 60,110 62.5,110 65,110 67.5,110 70,110 72.5,110 75,110 77.5,110 80,110 82.5,110 85,110 87.5,110 90,110 92.5,110 95,110 97.5,110 100,110 102.5,110 105,110 107.5,110 110,110 112.5,110 115,110 117.5,110 120,110 122.5,110 125,110 127.5,110 130,110 5,112.5 7.5,112.5 10,112.5 12.5,112.5 15,112.5 17.5,112.5 20,112.5 22.5,112.5 25,112.5 27.5,112.5 32.5,112.5 35,112.5 37.5,112.5 40,112.5 42.5,112.5 45,112.5 47.5,112.5 50,112.5 52.5,112.5 55,112.5 57.5,112.5 60,112.5 62.5,112.5 65,112.5 67.5,112.5 70,112.5 72.5,112.5 75,112.5 77.5,112.5 80,112.5 82.5,112.5 85,112.5 87.5,112.5 90,112.5 92.5,112.5 95,112.5 97.5,112.5 100,112.5 102.5,112.5 105,112.5 107.5,112.5 110,112.5 112.5,112.5 115,112.5 117.5,112.5 120,112.5 122.5,112.5 125,112.5 127.5,112.5 130,112.5
GND-485: C10.1 C11.1 D1.1 D2.1 R16.1 U4.11 U4.14 U4.16 U4.20 | length 65.2
  Top Layer w0.254: U4.14 v1(72.651,37.738) ; v1(75.191,34.944) U4.16
  Top Layer w0.6: U4.11 68.841,38.64 70.104,39.903 79.324,39.903 80.271,38.957 U4.20 80.271,34.144 C10.1 C11.1 R16.1 ; v1(75.546,14.954) D1.1 D2.1
  Bottom Layer w0.6: 72.651,34.138 73.457,34.944 ; 72.651,35.75 73.457,34.944 ; v1(72.651,39.897) v1(72.651,37.738) 72.651,17.85 v1(75.546,14.954) ; 72.708,34.944 73.457,34.944 ; v1(75.191,34.944) 73.457,34.944
IIC1_SCL: R7.1 U1.92 U3.6 | length 25.6
  Top Layer w0.203: U1.92 85.077,85.585 87.369,87.877 U3.6 92.475,87.877 92.932,87.42 R7.1
IIC1_SDA: R8.1 U1.93 U3.5 | length 30.5
  Top Layer w0.203: U1.93 84.815,86.085 87.877,89.147 U3.5 92.729,89.147 94.177,87.7 94.177,82.328 R8.1
LCD_5V: J8.1 J8.2 J8.3 Q1.D | length 13.6
  Top Layer w1: Q1.D 111.354,83.261 v4(112.963,81.652)
  Bottom Layer w0.6: J8.3 113.963,80.652 v4(112.963,81.652) ; J8.2 v4(112.963,81.652) ; J8.1 113.963,82.652 v4(112.963,81.652)
LCD_POWER: R20.1 U1.81 | length 31.4
  Top Layer w0.203: U1.81 86.082,80.085 88.671,77.495 95.86,77.495 99.187,80.823 R20.1
LCD_RXD: R27.2 U1.79 | length 30.6
  Top Layer w0.203: U1.79 86.218,79.085 88.367,76.937 96.164,76.937 97.682,78.454 R27.2
LCD_TXD: R26.2 U1.78 | length 30
  Top Layer w0.203: U1.78 85.855,78.585 88.119,76.32 R26.2
LED1: LED1.1 U1.88 | length 5
  Top Layer w0.203: U1.88 74.365,83.585 75.279,84.499 LED1.1
LED2: LED2.1 U1.87 | length 5
  Top Layer w0.203: U1.87 74.407,83.085 75.279,82.213 LED2.1
NetC2_2: C2.2 U1.73 | length 3.9
  Top Layer w0.203: U1.73 69.484,72.463 C2.2
NetC5_1: C5.1 U1.49 | length 6.9
  Top Layer w0.203: C5.1 53.421,78.085 U1.49
NetC19_2: C19.2 C20.2 C21.2 FB1.1 U6.0 U6.2 | length 17.4
  Top Layer w1: FB1.1 86.148,57.514 C21.2 C20.2 C19.2 90.621,55.296 U6.0 U6.2
NetD3_2: D3.2 L1.2 U5.2
NetDZ1_5: DZ1.5 R55.2 | length 5.6
  Top Layer w0.254: DZ1.5 R55.2
NetJ4_4: J4.4 R54.1 | length 15.2
  Top Layer w0.254: R54.1 63.729,13.665 64.77,12.624 64.77,10.617 66.091,9.296 71.23,9.296 J4.4
NetJ4_9: J4.9 R53.1 | length 13.5
  Top Layer w0.254: R53.1 63.703,11.582 64.166,11.119 64.166,10.205 70.082,4.289 J4.9
NetJ5_2: J5.2 R36.2 R50.2 | length 38.5
  Top Layer w0.203: R50.2 v1(34.646,39.262) R36.2
  Bottom Layer w0.203: v1(34.646,39.262) 36.297,37.611 36.297,21.844 40.878,17.262 J5.2
NetJ5_3: J5.3 R38.2 R48.2 | length 32.3
  Top Layer w0.203: R48.2 v1(34.646,34.182) R38.2
  Bottom Layer w0.203: v1(34.646,34.182) 34.646,20.726 38.108,17.264 J5.3
NetJ5_9: J5.9 R17.2 R51.2 | length 44.5
  Top Layer w0.203: R51.2 v1(34.646,41.802) R17.2
  Bottom Layer w0.203: v1(34.646,41.802) 36.957,39.49 36.957,22.479 42.263,17.173 J5.9
NetJ5_10: J5.10 R39.2 R49.2 | length 38.3
  Top Layer w0.203: R49.2 v1(34.646,36.722) R39.2
  Bottom Layer w0.203: v1(34.646,36.722) 35.662,35.706 35.662,21.107 39.493,17.276 J5.10
NetJ6_1: J6.1 R28.2 U8.4 | length 7.1
  Top Layer w0.203: U8.4 J6.1 66.319,30.334 R28.2
NetJ6_3: J6.3 R52.2 U11.4 | length 13.1
  Top Layer w0.203: U11.4 59.538,25.883 J6.3 62.738,26.086 64.541,26.086 65.126,26.67 R52.2
NetJ8_5: J8.5 R26.1 | length 12.4
  Top Layer w0.203: R26.1 105.398,77.673 112.343,77.673 v1(113.322,78.652)
  Bottom Layer w0.203: v1(113.322,78.652) J8.5
NetJ8_6: J8.6 R27.1 | length 11.8
  Top Layer w0.203: R27.1 v1(112.243,78.454)
  Bottom Layer w0.203: v1(112.243,78.454) 113.045,77.652 J8.6
NetJ9_2: J9.2 R13.1 | length 4.7
  Top Layer w0.203: R13.1 73.921,26.613 74.6,25.933 J9.2
NetJ10_1: J10.1 R30.2 | length 8.3
  Top Layer w0.6: R30.2 J10.1@128.737,11.532
NetLED1_2: LED1.2 R3.1 | length 2.8
  Top Layer w0.203: LED1.2 R3.1
NetLED2_2: LED2.2 R34.1 | length 2.8
  Top Layer w0.203: LED2.2 R34.1
NetQ1_G: Q1.G R18.2 R19.2 | length 10.3
  Top Layer w0.203: R19.2 R18.2 109.309,87.249 Q1.G
  Top Layer w0.6: R19.2@104.178,87.236 107.061,87.236 Q1.G
NetQ2_1: Q2.1 R19.1 | length 3.3
  Top Layer w0.203: Q2.1 R19.1
NetQ2_2: Q2.2 R20.2 | length 2.2
  Top Layer w0.203: R20.2 Q2.2
NetQ3_1: Q3.1 R55.1 | length 2.9
  Top Layer w0.254: R55.1 Q3.1
NetQ3_2: Q3.2 R56.1 | length 1.9
  Top Layer w0.254: Q3.2 R56.1@18.186,30.023
NetR5_2: R5.2 U2.7 | length 5.9
  Top Layer w0.203: R5.2 46.298,91.129 47.187,90.24 U2.7
NetR6_1: R6.1 U2.3 | length 12
  Top Layer w0.203: U2.3 40.748,88.97 40.081,89.637 40.081,91.516 44.266,95.701 R6.1
NetR10_1: R10.1 U4.13 U4.18 | length 13.1
  Top Layer w0.254: R10.1 71.66,34.551 71.381,34.83 U4.13 71.381,38.005 71.889,38.513 77.223,38.513 77.731,38.005 U4.18
NetR11_2: R11.2 U4.4 | length 3.6
  Top Layer w0.254: U4.4 76.461,47.657 76.664,47.86 R11.2
NetR12_1: R12.1 U4.15 U4.17 | length 7.9
  Top Layer w0.254: R12.1 U4.15 73.921,37.37 74.429,37.878 75.953,37.878 76.461,37.37 U4.17
NetR14_2: R14.2 U4.5 U4.6 | length 5
  Top Layer w0.203: U4.6 U4.5
  Top Layer w0.254: U4.6 73.921,47.149 74.53,47.759 R14.2
NetR15_2: R15.2 U4.7 | length 3.7
  Top Layer w0.254: R15.2 72.397,47.911 72.651,47.657 U4.7
NetR22_2: R22.2 R29.1 U8.1 | length 4.7
  Top Layer w0.203: R22.2 R29.1 U8.1
NetR23_2: R23.2 U7.3 | length 2.8
  Top Layer w0.203: R23.2@11.362,106.418 U7.3
NetR24_1: R24.1 U7.18 | length 3.9
  Top Layer w0.203: U7.18 31.578,102.458 R24.1
NetR25_1: R25.1 U7.16 | length 3.1
  Top Layer w0.203: U7.16 R25.1@33.343,98.458
NetR35_1: R35.1 U9.1 | length 4.7
  Top Layer w0.203: U9.1 45.346,53.689 46.057,54.4 R35.1
NetR37_2: R37.2 U9.15 | length 9.5
  Top Layer w0.203: U9.15 53.689,51.428 54.712,52.451 54.712,54.595 R37.2
NetR40_1: R40.1 U9.4 | length 10.2
  Top Layer w0.203: U9.4 46.769,48.888 47.015,49.135 47.015,55.998 R40.1
NetR42_2: R42.2 U9.12 | length 12.8
  Top Layer w0.203: U9.12 53.144,47.618 55.499,49.973 55.499,55.86 R42.2
NetR45_1: R45.1 U9.7 | length 14.9
  Top Layer w0.203: U9.7 46.921,45.078 47.473,45.63 47.473,54.403 R45.1
NetR47_2: R47.2 U9.9 | length 16.2
  Top Layer w0.203: U9.9 52.839,43.808 56.319,47.288 R47.2
NRST: C1.2 R1.1 U1.14 | length 12.3
  Top Layer w0.203: R1.1 59.55,100.152 C1.2 60.833,98.869 60.833,97.548 63.984,94.397 U1.14
OSC_IN: C3.1 U1.12 Y1.2 | length 13.5
  Top Layer w0.203: U1.12 64.984,96.353 67.583,98.952 Y1.2 68.65,101.365 C3.1
OSC_OUT: C4.1 U1.13 Y1.1 | length 11.6
  Top Layer w0.203: C4.1 64.408,101.492 63.57,100.654 Y1.1 63.57,97.098 64.484,96.183 U1.13
RELAY1: DZ1.6 J4.8 | length 87.5
  Top Layer w0.4: DZ1.6 9.525,24.054 9.525,18.161 10.312,17.374 17.399,17.374 22.174,12.598 22.174,4.324 24.441,2.057 72.552,2.057 J4.8
RELAY2: DZ1.3 J4.3 | length 85.5
  Top Layer w0.4: DZ1.3 8.128,10.719 19.253,10.719 21.158,8.814 21.158,2.616 22.657,1.118 74.371,1.118 76.168,2.914 J4.3
RELAY_CTR: R56.2 U1.51 | length 66.7
  Top Layer w0.203: v1(58.484,73.901) U1.51
  Top Layer w0.254: R56.2 v1(20.295,31.623)
  Bottom Layer w0.203: 40.183,47.015 58.298,65.13 58.298,65.529 58.484,65.715 v1(58.484,73.901)
  Bottom Layer w0.254: v1(20.295,31.623) 20.295,36.805 30.505,47.015 40.183,47.015
RFID_RXD: U1.83 U10.3 | length 53.3
  Top Layer w0.203: v1(70.239,81.085) U1.83
  Bottom Layer w0.203: v1(70.239,81.085) 70.239,76.725 81.28,65.684 81.28,38.47 U10.3
RFID_TXD: U1.80 U10.2 | length 48.1
  Top Layer w0.203: v1(71.012,79.585) U1.80
  Bottom Layer w0.203: v1(71.012,79.585) 71.012,77.045 81.991,66.065 81.991,40.299 U10.2
RS485_A: D1.2 J7.4 R9.1 R10.2 R13.2 ZD1.1 | length 49
  Top Layer w0.254: R9.1 R10.2 R13.2@71.66,28.836 ; R13.2 71.635,25.471 D1.2 ; D1.2@77.477,19.679 79.884,17.272 84.314,17.272 ZD1.1 96.102,15.048 100,11.151 J7.4@100,4.521
RS485_B: D2.2 J7.3 J9.1 R12.2 R16.2 ZD1.2 | length 48.4
  Top Layer w0.254: R12.2 76.207,31.249 R16.2 78.62,23.007 D2.2 92.792,19.654 105.08,7.366 J7.3@105.08,4.521 ; J7.3@105.08,5.309 J7.3@105.867,4.521
START_STOP1: J4.6 R21.1 | length 32.5
  Top Layer w0.3: R21.1 v1(55.956,10.693)
  Bottom Layer w0.3: v1(55.956,10.693) 55.956,6.502 60.122,2.337 78.371,2.337 J4.6
START_STOP2: J4.1 U11.1 | length 27.6
  Top Layer w0.203: U11.1 61.138,18.517 70.32,18.517 J4.1
STEP_MOTOR1_CP: J5.14 U1.35 | length 111.9
  Top Layer w0.203: J5.14 28.413,10.5 22.809,16.104 22.809,77.118 30.776,85.085 U1.35
STEP_MOTOR1_DIR: J5.7 U1.34 | length 109.5
  Top Layer w0.203: J5.7 27.028,10.75 22.309,15.469 22.309,77.326 30.568,85.585 U1.34
STEP_MOTOR1_EN: J5.15 U1.33 | length 112.8
  Top Layer w0.203: J5.15 25.643,11.161 21.809,14.995 21.809,77.533 30.361,86.085 U1.33
STEP_MOTOR2_CP: J5.5 U1.42 | length 106.8
  Top Layer w0.203: J5.5 32.568,9.85 24.383,18.035 24.383,76.491 29.476,81.585 U1.42
STEP_MOTOR2_DIR: J5.13 U1.41 | length 110.1
  Top Layer w0.203: J5.13 31.183,10.066 23.883,17.367 23.883,76.698 29.269,82.085 U1.41
STEP_MOTOR2_EN: J5.6 U1.40 | length 107.7
  Top Layer w0.203: J5.6 29.798,10.221 23.383,16.637 23.383,76.905 29.062,82.585 U1.40
STEP_MOTOR3_CP: J5.11 U1.45 | length 108.2
  Top Layer w0.203: J5.11 36.723,8.946 25.883,19.787 25.883,75.87 30.098,80.085 U1.45
STEP_MOTOR3_DIR: J5.4 U1.44 | length 105.8
  Top Layer w0.203: J5.4 35.338,9.247 25.383,19.202 25.383,76.077 29.891,80.585 U1.44
STEP_MOTOR3_EN: J5.12 U1.43 | length 109.1
  Top Layer w0.203: J5.12 33.953,9.481 24.883,18.551 24.883,76.284 29.683,81.085 U1.43
SWCLK: J2.3 U1.76 | length 70.6
  Top Layer w0.203: U1.76 73.647,77.585 82.296,68.936 117.678,68.936 129.642,56.972 129.642,56.032 J2.3
SWDIO: J2.2 U1.72 | length 77.4
  Top Layer w0.203: U1.72 68.984,76.528 69.444,76.987 73.177,76.987 81.839,68.326 117.526,68.326 129.083,56.769 129.083,54.051 J2.2
UART1_RX: J3.1 U1.69 | length 66.1
  Top Layer w0.203: U1.69 67.484,67.72 68.758,66.446 116.664,66.446 120.904,62.206 J3.1
UART1_TX: J3.2 U1.68 | length 65
  Top Layer w0.203: U1.68 66.984,67.513 68.551,65.946 115.994,65.946 118.364,63.576 J3.2
USB_DM: J10.2 U1.70 | length 116.4
  Top Layer w0.203: U1.70 67.984,68.211 69.19,67.005 117.246,67.005 122.631,61.62 122.631,17.233 125.894,13.97 J10.2@128.737,13.97
USB_DP: J10.3 U1.71 | length 115
  Top Layer w0.203: U1.71 68.484,68.418 69.295,67.607 117.352,67.607 123.131,61.828 123.131,17.585 124.61,16.106 J10.3@128.956,16.106
V485: C10.2 C11.2 R9.2 U4.12 U4.19 | length 22.1
  Top Layer w0.254: R9.2 69.323,34.678 70.111,35.465 U4.12 70.111,38.386 70.873,39.148 78.366,39.148 79.001,38.513 U4.19 79.001,34.703 78.62,34.322 C10.2 C11.2
WIFI_EN: R23.1 U1.46 U7.1 | length 72.4
  Top Layer w0.203: R23.1 11.354,109.804 11.967,110.418 U7.1 v1(15.693,110.418) ; v1(50.825,78.969) 51.442,79.585 U1.46
  Bottom Layer w0.203: v1(15.693,110.418) 28.47,110.418 31.33,107.557 44.081,107.557 50.825,100.813 v1(50.825,78.969)
WIFI_RXD: U1.48 U7.22 | length 52.9
  Top Layer w0.203: U7.22 v1(31.743,110.458) ; v1(52.578,78.283) 52.88,78.585 U1.48
  Bottom Layer w0.203: v1(31.743,110.458) 32.828,109.372 44.298,109.372 52.578,101.092 v1(52.578,78.283)
WIFI_TXD: U1.47 U7.21 | length 51.7
  Top Layer w0.203: U7.21 v1(31.623,108.458) ; v1(51.689,78.613) 52.161,79.085 U1.47
  Bottom Layer w0.203: v1(31.623,108.458) 44.069,108.458 51.689,100.838 v1(51.689,78.613)
pads on no net: DZ1.1 DZ1.4 J8.4 J8.7 R41.2 R43.2 R44.2 R46.2 U1.0 U1.1 U1.2 U1.3 U1.4 U1.5 U1.7 U1.8 U1.9 U1.15 U1.16 U1.17 U1.18 U1.23 U1.36 U1.38 U1.39 U1.52 U1.55 U1.56 U1.57 U1.58 U1.65 U1.67 U1.77 U1.82 U1.84 U1.85 U1.86 U1.89 U1.90 U1.91 U1.95 U1.96 U1.97 U1.98 U3.1 U3.2 U3.3 U3.7 U7.2 U7.4 U7.5 U7.6 U7.7 U7.9 U7.10 U7.11 U7.12 U7.13 U7.14 U7.17 U7.19 U7.20 U10.5 U10.6 U10.7 U10.8
copper on no net:
  other v1: 48.5,51.5

## Polygon pours and split planes (outlines as drawn)
GND on Top Layer "Top Layer-No Net" (solid, remove dead copper, pour order 1000): 0,0 134.7,0 134.7,120 0,120
GND on Bottom Layer "Top Layer-No Net" (solid, remove dead copper, pour order 1001): 0,0 134.7,0 134.7,120 0,120

## Keep-outs
Keep-Out Layer:
  circle w0.127: c132.7,62.019 r1.5
  circle w0.127: c132.7,114.019 r1.5
  circle w0.127: c2,114.019 r1.5
  circle w0.127: c2,62.019 r1.5
  circle w0.127: c123.773,1.981 r1.5
  circle w0.127: c132.7,118 r1.5
  circle w0.127: c2,118 r1.5
  lines w0.127: -1.118,9.55 -1.118,120 135.636,120 135.636,6.604 129.616,6.604 128.549,5.537 128.549,0 5.74,0 5.74,9.55 -1.118,9.55

## Other copper
Top Layer:
  rectangle net +5V: 114.478,38.633 117.17,54.94
  rectangle net NetD3_2: 113.538,22.047 117.856,27.711
  pour cut-out: 110.592,37.592 110.592,27.432 120.752,27.432 120.752,37.592
  region net NetD3_2: 105.207,33.172 105.207,31.953 105.308,31.852 111.989,31.852 113.513,30.328 113.513,28.677 117.78,28.677 117.881,28.778 117.881,31.547 116.256,33.172

## Silkscreen, mask and mechanical layers (free items; w line width, h text height)
Top Overlay:
  lines w0.127: 2,62.019 134,62.019 134,114.019 2,114.019 2,62.019
  text "YarnControl_Mainboard_v1.2" at 6.909,57.76 h1
  text "GND" at 113.995,56.413 h1
  text "TX" at 117.704,56.337 h1
  text "RX" at 120.244,56.286 h1
  text "GND" at 127.965,55.169 h1
  text "CLK" at 127.965,52.756 h1
  text "IO" at 129.108,50.165 h1
  text "2018.12.20" at 26.264,49.606 h1
  text "3.3" at 128.067,47.523 h1
  text "GND" at 85.75,40.513 h1
  text "0577-65102608" at 13.375,40.472 h1.1 r90
  text "TXD" at 85.852,37.922 h1
  text "RXD" at 85.843,35.333 h1
  text "+5V" at 86.03,32.893 h1
  text "步进1_方向" at 27.305,8.709 h1 r90
  text "步进2_脉冲" at 32.868,8.709 h1 r90
  text "步进1_方向" at 35.535,8.709 h1 r90
  text "24V" at 113.69,8.687 h1
  text "485A" at 97.841,8.585 h1
  text "485B" at 103.124,8.585 h1
  text "GND" at 108.966,8.56 h1
  text "步进1_脉冲" at 28.727,-1.676 h1 r90

## Dimensions
0,0 to 134.7,0 on Top Overlay
-1.118,120 to 0,0 on Top Overlay

## Text inside footprints (layer, text, board x,y; h text height)
C17: Top Overlay "+" at 112.497,17.272 h1.27 r180; Top Overlay "+" at 109.525,16.942 h1.27 r180; Bottom Overlay "+" at 108.603,13.43 h1.02 r180
C18: Top Overlay "+" at 119.913,47.854 h1.27 r180; Top Overlay "+" at 116.942,47.523 h1.27 r180; Bottom Overlay "+" at 116.019,44.012 h1.02 r180
J4: Top Overlay "6" at 80.823,1.184 h1.5 r180; Top Overlay "9" at 72.513,1.184 h1.5 r180; Top Overlay "5" at 71.128,10.584 h1.5 r180; Top Overlay "1" at 81.958,10.584 h1.5 r180
J5: Top Overlay "9" at 42.763,1.184 h1.5 r180; Top Overlay "15" at 26.768,1.184 h1.5 r180; Top Overlay "8" at 24.301,10.684 h1.5 r180; Top Overlay "1" at 43.898,10.684 h1.5 r180